# EAGLE board LED-mini20-SHIM-x2 (EAGLE 9.6.2)
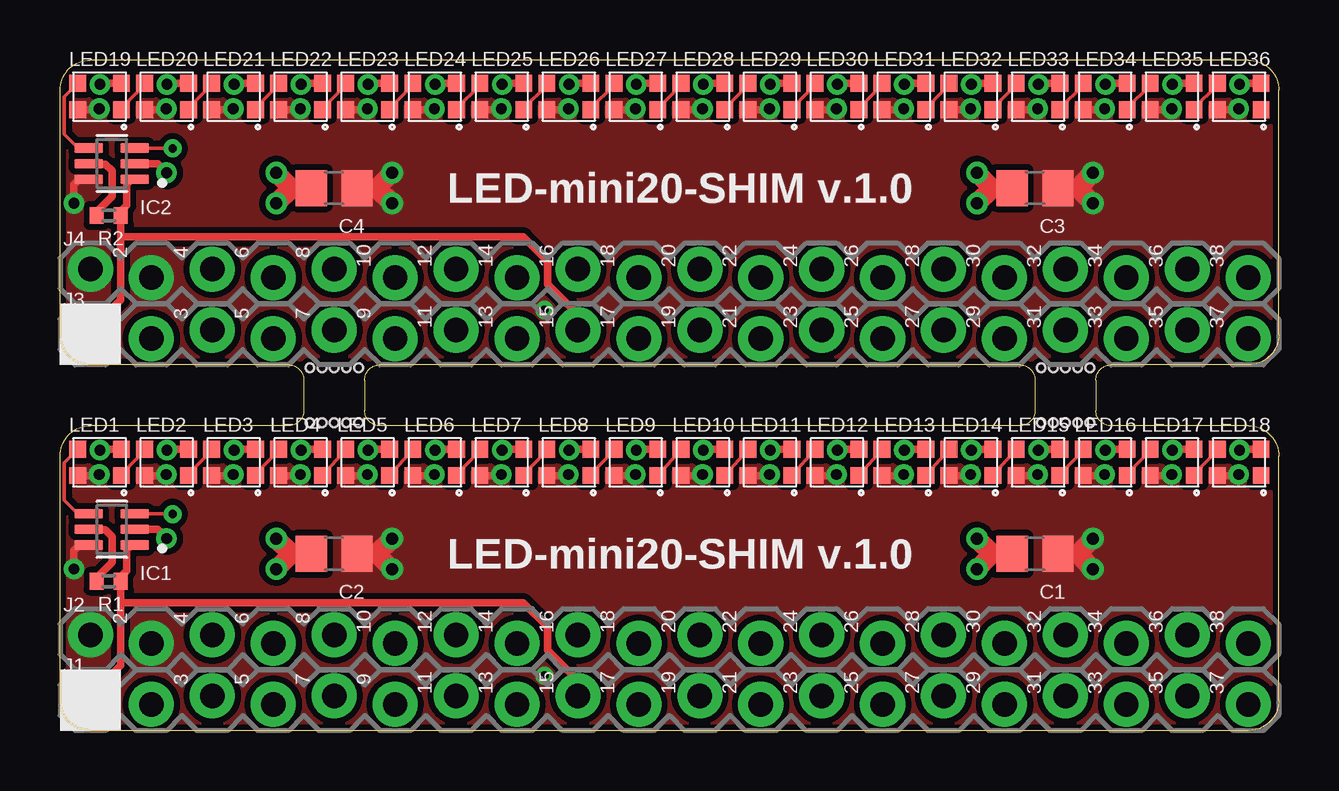
[diagram p0: board, top side]
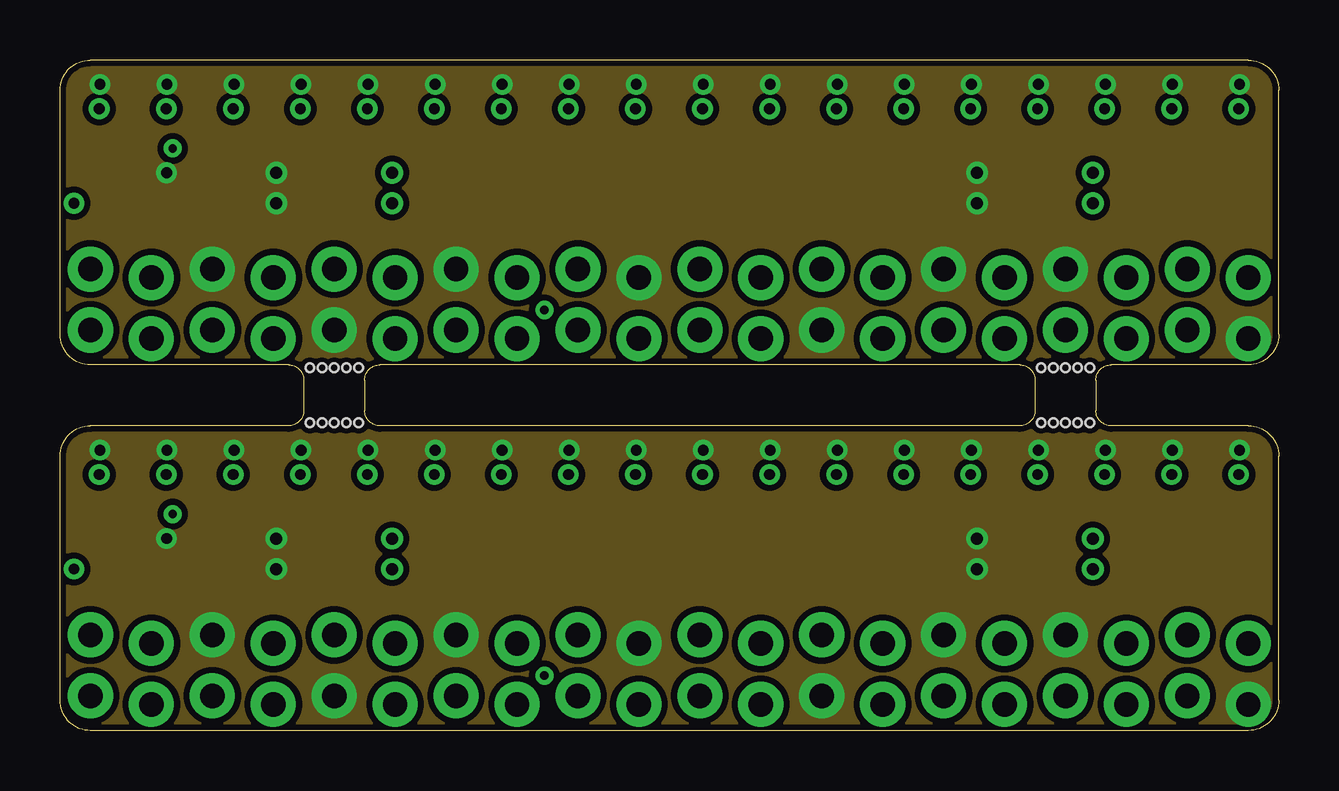
[diagram p1: board, inner layer Route2]
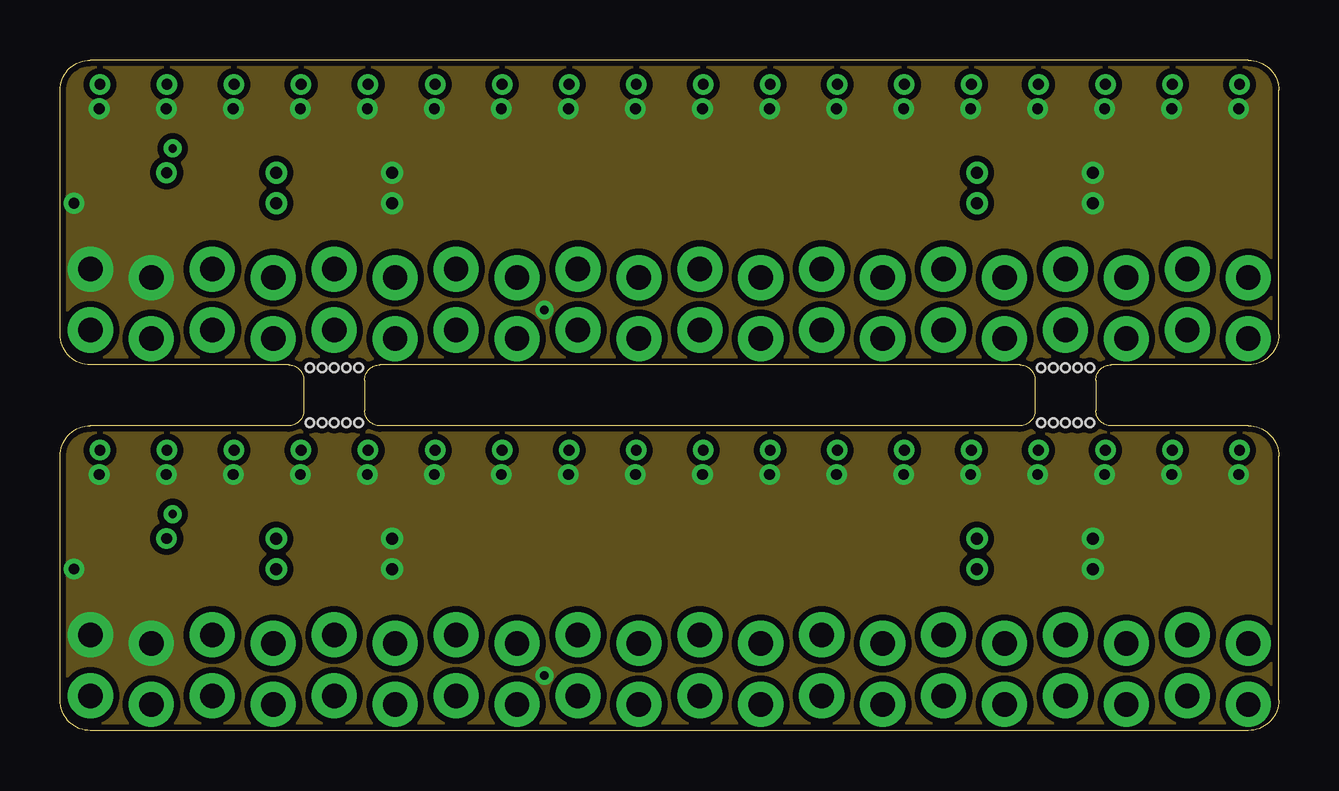
[diagram p2: board, inner layer Route15]
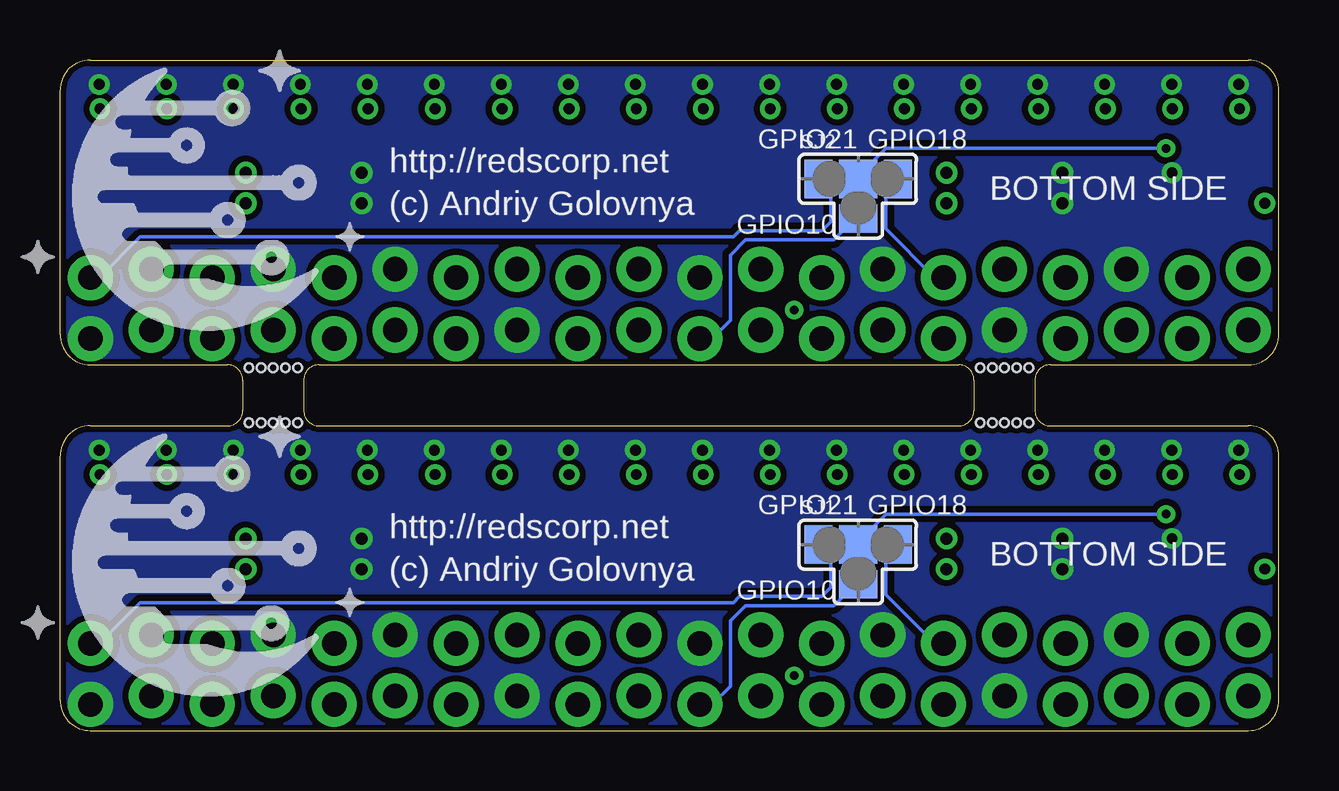
[diagram p3: board, bottom side, seen from below]

Size 50.8 x 27.94 mm. Coordinates in mm from the lower left corner, seen from the top.
Outline: 50.8,16.51 50.8,26.67 arc90 49.53,27.94 1.27,27.94 arc90 0,26.67 0,16.51 arc90 1.27,15.24 9.53,15.24 arc-90 10.16,14.61 10.16,13.34 arc-90 9.53,12.7 1.27,12.7 arc90 0,11.43 0,1.27 arc90 1.27,0 49.53,0 arc90 50.8,1.27 50.8,11.43 arc90 49.53,12.7 43.81,12.7 arc-90 43.18,13.34 43.18,14.61 arc-90 43.81,15.24 49.53,15.24 arc90 50.8,16.51
Outline: 40.01,15.24 13.34,15.24 arc90 12.7,14.61 12.7,13.34 arc90 13.34,12.7 40.01,12.7 arc90 40.64,13.34 40.64,14.61 arc90 40.01,15.24
Copper layers (1+2*15+16): Top 0.035mm / dielectric 0.2mm / Route2 0.035mm / dielectric 1.5mm / Route15 0.035mm / dielectric 0.2mm / Bottom 0.035mm
Design rules "default *": minimum track width 6mil, minimum drill 0.35mm, track to track 6mil, track to pad 6mil, pad to pad 6mil, via to via 6mil, smd to smd 6mil, copper to edge 6mil, drill to drill 6mil, minimum pad ring 10mil, minimum via ring 8mil, stop-mask expansion 4mil, vias tented up to drill 20mil, thermal gap 10mil
Holes 0.35 mm at 41.91,15.11 42.42,15.11 42.93,15.11 41.4,15.11 40.89,15.11 41.91,12.83 42.42,12.83 42.93,12.83 41.4,12.83 40.89,12.83 11.43,15.11 11.94,15.11 12.45,15.11 10.92,15.11 10.41,15.11 11.43,12.83 11.94,12.83 12.45,12.83 10.92,12.83 10.41,12.83

## Footprints (pad centres in the part's own frame; a part is rotated, then mirrored left to right if it is on the bottom)
C0805 = smd 1.3 x 1.5: 1 -0.95,0; 2 0.95,0
SOT65P210X110-6N = smd 1.19 x 0.4: 1 -0.96,0.65; 2 -0.96,0; 3 -0.96,-0.65; 4 0.96,-0.65; 5 0.96,0; 6 0.96,0.65
1X20_LOCK = drill 1.016 pad 1.88: 1 0,0.178; 2 2.54,-0.178; 3 5.08,0.178; 4 7.62,-0.178; 5 10.16,0.178; 6 12.7,-0.178; 7 15.24,0.178; 8 17.78,-0.178; 9 20.32,0.178; 10 22.86,-0.178; 11 25.4,0.178; 12 27.94,-0.178; 13 30.48,0.178; 14 33.02,-0.178; 15 35.56,0.178; 16 38.1,-0.178; 17 40.64,0.178; 18 43.18,-0.178; 19 45.72,0.178; 20 48.26,-0.178
WS2812X-2020 = smd 0.7 x 0.7: DI -0.915,0.55; DO 0.915,-0.55; GND 0.915,0.55; VDD -0.915,-0.55
R0402 = smd 0.6 x 0.7: 1 -0.5,0; 2 0.5,0
SJ_3 = smd 1.168 x 1.6: 1 -1.651,0; 3 1.651,0 | smd 1.6 x 1.6: 2 0,0 | smd 1.6 x 1.168: 4 0,-1.651

## Placement (x,y rotation side)
C1  10uF  [C0805]  40.64,7.37 180 top
C2  10uF  [C0805]  11.43,7.37 180 top
C3  10uF  [C0805]  40.64,22.61 180 top
C4  10uF  [C0805]  11.43,22.61 180 top
IC1  TXB0101DCKR  [SOT65P210X110-6N]  2.16,8.38 180 top
IC2  TXB0101DCKR  [SOT65P210X110-6N]  2.16,23.62 180 top
J1  [1X20_LOCK]  1.27,1.27 0 top
J2  [1X20_LOCK]  1.27,3.81 0 top
J3  [1X20_LOCK]  1.27,16.51 0 top
J4  [1X20_LOCK]  1.27,19.05 0 top
LED1  WS2812C-2020  [WS2812X-2020]  1.65,11.18 0 top
LED2  WS2812C-2020  [WS2812X-2020]  4.45,11.18 0 top
LED3  WS2812C-2020  [WS2812X-2020]  7.24,11.18 0 top
LED4  WS2812C-2020  [WS2812X-2020]  10.03,11.18 0 top
LED5  WS2812C-2020  [WS2812X-2020]  12.83,11.18 0 top
LED6  WS2812C-2020  [WS2812X-2020]  15.62,11.18 0 top
LED7  WS2812C-2020  [WS2812X-2020]  18.41,11.18 0 top
LED8  WS2812C-2020  [WS2812X-2020]  21.21,11.18 0 top
LED9  WS2812C-2020  [WS2812X-2020]  24,11.18 0 top
LED10  WS2812C-2020  [WS2812X-2020]  26.8,11.18 0 top
LED11  WS2812C-2020  [WS2812X-2020]  29.59,11.18 0 top
LED12  WS2812C-2020  [WS2812X-2020]  32.38,11.18 0 top
LED13  WS2812C-2020  [WS2812X-2020]  35.18,11.18 0 top
LED14  WS2812C-2020  [WS2812X-2020]  37.97,11.18 0 top
LED15  WS2812C-2020  [WS2812X-2020]  40.77,11.18 0 top
LED16  WS2812C-2020  [WS2812X-2020]  43.56,11.18 0 top
LED17  WS2812C-2020  [WS2812X-2020]  46.35,11.18 0 top
LED18  WS2812C-2020  [WS2812X-2020]  49.15,11.18 0 top
LED19  WS2812C-2020  [WS2812X-2020]  1.65,26.42 0 top
LED20  WS2812C-2020  [WS2812X-2020]  4.45,26.42 0 top
LED21  WS2812C-2020  [WS2812X-2020]  7.24,26.42 0 top
LED22  WS2812C-2020  [WS2812X-2020]  10.03,26.42 0 top
LED23  WS2812C-2020  [WS2812X-2020]  12.83,26.42 0 top
LED24  WS2812C-2020  [WS2812X-2020]  15.62,26.42 0 top
LED25  WS2812C-2020  [WS2812X-2020]  18.41,26.42 0 top
LED26  WS2812C-2020  [WS2812X-2020]  21.21,26.42 0 top
LED27  WS2812C-2020  [WS2812X-2020]  24,26.42 0 top
LED28  WS2812C-2020  [WS2812X-2020]  26.8,26.42 0 top
LED29  WS2812C-2020  [WS2812X-2020]  29.59,26.42 0 top
LED30  WS2812C-2020  [WS2812X-2020]  32.38,26.42 0 top
LED31  WS2812C-2020  [WS2812X-2020]  35.18,26.42 0 top
LED32  WS2812C-2020  [WS2812X-2020]  37.97,26.42 0 top
LED33  WS2812C-2020  [WS2812X-2020]  40.77,26.42 0 top
LED34  WS2812C-2020  [WS2812X-2020]  43.56,26.42 0 top
LED35  WS2812C-2020  [WS2812X-2020]  46.35,26.42 0 top
LED36  WS2812C-2020  [WS2812X-2020]  49.15,26.42 0 top
LOGO1  MFDECLOGO_L_10MM  [MFDEC_L_10MM]  53.21,0.51 0 bottom
LOGO2  MFDECLOGO_L_10MM  [MFDEC_L_10MM]  53.21,15.75 0 bottom
R1  10K  [R0402]  2.03,6.22 180 top
R2  10K  [R0402]  2.03,21.46 180 top
SJ1  [SJ_3]  17.53,7.75 0 bottom
SJ2  [SJ_3]  17.53,22.99 0 bottom

## Library data of the parts
C1-C4 = rcl; SPICEPREFIX: C
IC1 IC2 = TXB0101DCKR
J1-J4 = _my_locked_connectors
LED1-LED36 = WS281X
LOGO1 LOGO2 = _my_logos
R1 R2 = rcl; SPICEPREFIX: R
SJ1 SJ2 = _my_jumpers

## Nets
3.3V: IC1.1 J1.1 J1.9 R1.1
3.3V1: IC2.1 J3.1 J3.9 R2.1
5V: C1.1 C2.1 IC1.6 J2.1 J2.2 LED1.VDD LED2.VDD LED3.VDD LED4.VDD LED5.VDD LED6.VDD LED7.VDD LED8.VDD LED9.VDD LED10.VDD LED11.VDD LED12.VDD LED13.VDD LED14.VDD LED15.VDD LED16.VDD LED17.VDD LED18.VDD
5V1: C3.1 C4.1 IC2.6 J4.1 J4.2 LED19.VDD LED20.VDD LED21.VDD LED22.VDD LED23.VDD LED24.VDD LED25.VDD LED26.VDD LED27.VDD LED28.VDD LED29.VDD LED30.VDD LED31.VDD LED32.VDD LED33.VDD LED34.VDD LED35.VDD LED36.VDD
DATA: IC1.3 SJ1.2
DATA1: IC2.3 SJ2.2
DI_FIRST: IC1.4 LED1.DI
DI_FIRST1: IC2.4 LED19.DI
DO_LAST: LED18.DO
DO_LAST1: LED36.DO
GND: C1.2 C2.2 IC1.2 J1.5 J1.13 J1.20 J2.3 J2.7 J2.10 J2.15 J2.17 LED1.GND LED2.GND LED3.GND LED4.GND LED5.GND LED6.GND LED7.GND LED8.GND LED9.GND LED10.GND LED11.GND LED12.GND LED13.GND LED14.GND LED15.GND LED16.GND LED17.GND LED18.GND
GND1: C3.2 C4.2 IC2.2 J3.5 J3.13 J3.20 J4.3 J4.7 J4.10 J4.15 J4.17 LED19.GND LED20.GND LED21.GND LED22.GND LED23.GND LED24.GND LED25.GND LED26.GND LED27.GND LED28.GND LED29.GND LED30.GND LED31.GND LED32.GND LED33.GND LED34.GND LED35.GND LED36.GND
GPIO0: J1.14
GPIO1: J2.14
GPIO2: J1.2
GPIO3: J1.3
GPIO4: J1.4
GPIO5: J1.15
GPIO6: J1.16
GPIO7: J2.13
GPIO8: J2.12
GPIO9: J1.11
GPIO10: J1.10 SJ1.4
GPIO11: J1.12
GPIO12: J2.16
GPIO13: J1.17
GPIO14: J2.4
GPIO15: J2.5
GPIO16: J2.18
GPIO17: J1.6
GPIO18: J2.6 SJ1.3
GPIO19: J1.18
GPIO20: J2.19
GPIO21: J2.20 SJ1.1
GPIO22: J1.8
GPIO23: J2.8
GPIO24: J2.9
GPIO25: J2.11
GPIO26: J1.19
GPIO27: J1.7
GPIO28: J3.2
GPIO29: J3.3
GPIO30: J3.4
GPIO31: J3.6
GPIO32: J3.7
GPIO33: J3.8
GPIO34: J3.10 SJ2.4
GPIO35: J3.11
GPIO36: J3.12
GPIO37: J3.14
GPIO38: J3.15
GPIO39: J3.16
GPIO40: J3.17
GPIO41: J3.18
GPIO42: J3.19
GPIO43: J4.4
GPIO44: J4.5
GPIO45: J4.6 SJ2.3
GPIO46: J4.8
GPIO47: J4.9
GPIO48: J4.11
GPIO49: J4.12
GPIO50: J4.13
GPIO51: J4.14
GPIO52: J4.16
GPIO53: J4.18
GPIO54: J4.19
GPIO55: J4.20 SJ2.1
N$1: LED1.DO LED2.DI
N$2: LED2.DO LED3.DI
N$3: LED3.DO LED4.DI
N$4: LED4.DO LED5.DI
N$5: LED5.DO LED6.DI
N$6: LED6.DO LED7.DI
N$7: LED7.DO LED8.DI
N$8: LED8.DO LED9.DI
N$9: LED9.DO LED10.DI
N$10: LED10.DO LED11.DI
N$11: LED11.DO LED12.DI
N$12: LED12.DO LED13.DI
N$13: LED13.DO LED14.DI
N$14: LED14.DO LED15.DI
N$15: LED15.DO LED16.DI
N$16: LED16.DO LED17.DI
N$17: LED17.DO LED18.DI
N$18: LED19.DO LED20.DI
N$19: LED20.DO LED21.DI
N$20: LED21.DO LED22.DI
N$21: LED22.DO LED23.DI
N$22: LED23.DO LED24.DI
N$23: LED24.DO LED25.DI
N$24: LED25.DO LED26.DI
N$25: LED26.DO LED27.DI
N$26: LED27.DO LED28.DI
N$27: LED28.DO LED29.DI
N$28: LED29.DO LED30.DI
N$29: LED30.DO LED31.DI
N$30: LED31.DO LED32.DI
N$31: LED32.DO LED33.DI
N$32: LED33.DO LED34.DI
N$33: LED34.DO LED35.DI
N$34: LED35.DO LED36.DI
N$35: IC2.5 R2.2
N$143: IC1.5 R1.2

## Tracks (layer width: path | path; a pad name or v marks a point on that pad's centre or on a via)
3.3V
  Top 0.305: J1.1 2.54,2.72 2.54,5.33 | 2.54,5.33 R1.1 2.53,6.4 2.79,6.66 2.79,7.53 2.99,7.73 IC1.1 | J1.9 21.59,2.08 20.32,3.35 20.32,4.32 19.3,5.33 2.54,5.33
3.3V1
  Top 0.305: J3.1 2.54,17.96 2.54,20.57 | 2.54,20.57 R2.1 2.53,21.64 2.79,21.89 2.79,22.77 2.99,22.97 IC2.1 | J3.9 21.59,17.32 20.32,18.59 20.32,19.56 19.3,20.57 2.54,20.57
5V  (via drill 0.35, 0.45, 0.5)
  Top 0.305: LED1.VDD 1.59,10.63 v1.64,10.67 | LED2.VDD 4.39,10.63 v4.43,10.67 | LED3.VDD 7.18,10.63 v7.22,10.67 | LED4.VDD 9.97,10.63 v10.02,10.67 | LED5.VDD 12.77,10.63 v12.81,10.67 | LED6.VDD 15.56,10.63 v15.61,10.67 | LED7.VDD 18.36,10.63 v18.4,10.67 | LED8.VDD 21.15,10.63 v21.19,10.67 | LED9.VDD 23.95,10.63 v23.99,10.67 | LED10.VDD 26.74,10.63 v26.78,10.67 | LED11.VDD 29.53,10.63 v29.57,10.67 | LED12.VDD 32.33,10.63 v32.37,10.67 | LED13.VDD 35.12,10.63 v35.16,10.67 | LED14.VDD 37.91,10.63 v37.96,10.67 | LED15.VDD 40.71,10.63 v40.75,10.67 | LED16.VDD 43.5,10.63 v43.55,10.67 | LED17.VDD 46.3,10.63 v46.34,10.67 | LED18.VDD 49.09,10.63 v49.13,10.67 | v0.58,6.73 0.58,7.49 0.82,7.73 IC1.6
  Top 0.813: 13.21,7.37 v13.84,6.73 | C2.1 13.21,7.37 | 13.21,7.37 v13.84,8 | 42.42,7.37 v43.05,6.73 | C1.1 42.42,7.37 | 42.42,7.37 v43.05,8
  other vias: 20.19,2.29
  pour Top (isolate 0.254, no thermals): -3.81,0 -3.81,12.7 50.8,12.7 50.8,0
  pour Route15 (isolate 0.254, no thermals): 0,-3.81 0,12.7 50.8,12.7 50.8,-3.81
5V1  (via drill 0.35, 0.45, 0.5)
  Top 0.305: LED19.VDD 1.59,25.87 v1.64,25.91 | LED20.VDD 4.39,25.87 v4.43,25.91 | LED21.VDD 7.18,25.87 v7.22,25.91 | LED22.VDD 9.97,25.87 v10.02,25.91 | LED23.VDD 12.77,25.87 v12.81,25.91 | LED24.VDD 15.56,25.87 v15.61,25.91 | LED25.VDD 18.36,25.87 v18.4,25.91 | LED26.VDD 21.15,25.87 v21.19,25.91 | LED27.VDD 23.95,25.87 v23.99,25.91 | LED28.VDD 26.74,25.87 v26.78,25.91 | LED29.VDD 29.53,25.87 v29.57,25.91 | LED30.VDD 32.33,25.87 v32.37,25.91 | LED31.VDD 35.12,25.87 v35.16,25.91 | LED32.VDD 37.91,25.87 v37.96,25.91 | LED33.VDD 40.71,25.87 v40.75,25.91 | LED34.VDD 43.5,25.87 v43.55,25.91 | LED35.VDD 46.3,25.87 v46.34,25.91 | LED36.VDD 49.09,25.87 v49.13,25.91 | v0.58,21.97 0.58,22.73 0.82,22.97 IC2.6
  Top 0.813: 13.21,22.61 v13.84,21.97 | C4.1 13.21,22.61 | 13.21,22.61 v13.84,23.24 | 42.42,22.61 v43.05,21.97 | C3.1 42.42,22.61 | 42.42,22.61 v43.05,23.24
  other vias: 20.19,17.53
  pour Top (isolate 0.254, no thermals): -3.81,15.24 -3.81,27.94 50.8,27.94 50.8,15.24
  pour Route15 (isolate 0.254, no thermals): 0,15.24 0,27.94 50.8,27.94 50.8,15.24
DATA  (via drill 0.35)
  Top 0.152: IC1.3 4.68,9.03 v4.7,9.02
  Bottom 0.152: v4.7,9.02 16.38,9.02 17.53,7.87 SJ1.2
DATA1  (via drill 0.35)
  Top 0.152: IC2.3 4.68,24.27 v4.7,24.26
  Bottom 0.152: v4.7,24.26 16.38,24.26 17.53,23.11 SJ2.2
DI_FIRST
  Top 0.152: LED1.DI 0.18,11.17 0.18,9.6 0.76,9.02 1.18,9.02 IC1.4
DI_FIRST1
  Top 0.152: LED19.DI 0.18,26.41 0.18,24.84 0.76,24.26 1.18,24.26 IC2.4
GND  (via drill 0.45, 0.5)
  Top 0.305: LED1.GND 1.71,11.73 v1.67,11.68 | LED2.GND 4.5,11.73 v4.46,11.68 | LED3.GND 7.3,11.73 v7.25,11.68 | LED4.GND 10.09,11.73 v10.05,11.68 | LED5.GND 12.88,11.73 v12.84,11.68 | LED6.GND 15.68,11.73 v15.64,11.68 | LED7.GND 18.47,11.73 v18.43,11.68 | LED8.GND 21.27,11.73 v21.23,11.68 | LED9.GND 24.06,11.73 v24.02,11.68 | LED10.GND 26.86,11.73 v26.81,11.68 | LED11.GND 29.65,11.73 v29.61,11.68 | LED12.GND 32.44,11.73 v32.4,11.68 | LED13.GND 35.24,11.73 v35.2,11.68 | LED14.GND 38.03,11.73 v37.99,11.68 | LED15.GND 40.83,11.73 v40.78,11.68 | LED16.GND 43.62,11.73 v43.58,11.68 | LED17.GND 46.41,11.73 v46.37,11.68 | LED18.GND 49.21,11.73 v49.16,11.68 | v4.45,8 4.06,8.38 IC1.2
  Top 0.813: 9.65,7.37 v9.02,8 | C2.2 9.65,7.37 | 9.65,7.37 v9.02,6.73 | 38.86,7.37 v38.23,8 | C1.2 38.86,7.37 | 38.86,7.37 v38.23,6.73
  pour Bottom (isolate 0.254, no thermals): 0,0 0,12.7 54.61,12.7 54.61,0
  pour Route2 (isolate 0.254, no thermals): 0,0 0,12.7 50.67,12.7 50.67,0
GND1  (via drill 0.45, 0.5)
  Top 0.305: LED19.GND 1.71,26.97 v1.67,26.92 | LED20.GND 4.5,26.97 v4.46,26.92 | LED21.GND 7.3,26.97 v7.25,26.92 | LED22.GND 10.09,26.97 v10.05,26.92 | LED23.GND 12.88,26.97 v12.84,26.92 | LED24.GND 15.68,26.97 v15.64,26.92 | LED25.GND 18.47,26.97 v18.43,26.92 | LED26.GND 21.27,26.97 v21.23,26.92 | LED27.GND 24.06,26.97 v24.02,26.92 | LED28.GND 26.86,26.97 v26.81,26.92 | LED29.GND 29.65,26.97 v29.61,26.92 | LED30.GND 32.44,26.97 v32.4,26.92 | LED31.GND 35.24,26.97 v35.2,26.92 | LED32.GND 38.03,26.97 v37.99,26.92 | LED33.GND 40.83,26.97 v40.78,26.92 | LED34.GND 43.62,26.97 v43.58,26.92 | LED35.GND 46.41,26.97 v46.37,26.92 | LED36.GND 49.21,26.97 v49.16,26.92 | v4.45,23.24 4.06,23.62 IC2.2
  Top 0.813: 9.65,22.61 v9.02,23.24 | C4.2 9.65,22.61 | 9.65,22.61 v9.02,21.97 | 38.86,22.61 v38.23,23.24 | C3.2 38.86,22.61 | 38.86,22.61 v38.23,21.97
  pour Bottom (isolate 0.254, no thermals): 0,15.24 0,27.94 54.61,27.94 54.61,15.24
  pour Route2 (isolate 0.254, no thermals): 0,15.24 0,31.75 50.8,31.75 50.8,15.24
GPIO10
  Bottom 0.152: J1.10 23.62,1.09 22.86,1.85 22.86,4.57 22.23,5.21 18.54,5.21 17.65,6.1 SJ1.4
GPIO18
  Bottom 0.152: J2.6 14.35,3.63 16.38,5.66 16.38,7.24 SJ1.3 17.13,7.75
GPIO21
  Bottom 0.152: SJ1.1 19.18,7.62 18.67,7.11 18.67,5.97 19.05,5.59 22.48,5.59 22.73,5.33 47.45,5.33 49.15,3.63 J2.20
GPIO34
  Bottom 0.152: J3.10 23.62,16.33 22.86,17.09 22.86,19.81 22.23,20.45 18.54,20.45 17.65,21.34 SJ2.4
GPIO45
  Bottom 0.152: J4.6 14.35,18.87 16.38,20.9 16.38,22.48 SJ2.3 17.13,22.99
GPIO55
  Bottom 0.152: SJ2.1 19.18,22.86 18.67,22.35 18.67,21.21 19.05,20.83 22.48,20.83 22.73,20.57 47.45,20.57 49.15,18.87 J4.20
N$1
  Top 0.152: LED2.DI 3.53,11.67 2.57,10.7 LED1.DO
N$2
  Top 0.152: LED3.DI 6.32,11.67 5.36,10.7 LED2.DO
N$3
  Top 0.152: LED4.DI 9.12,11.67 8.15,10.7 LED3.DO
N$4
  Top 0.152: LED4.DO 10.95,10.69 11.91,11.65 LED5.DI
N$5
  Top 0.152: LED5.DO 13.74,10.69 14.71,11.65 LED6.DI
N$6
  Top 0.152: LED6.DO 16.54,10.69 17.5,11.65 LED7.DI
N$7
  Top 0.152: LED7.DO 19.33,10.69 20.29,11.65 LED8.DI
N$8
  Top 0.152: LED8.DO 22.12,10.69 23.09,11.65 LED9.DI
N$9
  Top 0.152: LED9.DO 24.92,10.69 25.88,11.65 LED10.DI
N$10
  Top 0.152: LED10.DO 27.71,10.69 28.68,11.65 LED11.DI
N$11
  Top 0.152: LED11.DO 30.51,10.69 31.47,11.65 LED12.DI
N$12
  Top 0.152: LED12.DO 33.3,10.69 34.26,11.65 LED13.DI
N$13
  Top 0.152: LED13.DO 36.09,10.69 37.06,11.65 LED14.DI
N$14
  Top 0.152: LED14.DO 38.89,10.69 39.85,11.65 LED15.DI
N$15
  Top 0.152: LED15.DO 41.68,10.69 42.65,11.65 LED16.DI
N$16
  Top 0.152: LED16.DO 44.48,10.69 45.44,11.65 LED17.DI
N$17
  Top 0.152: LED17.DO 47.27,10.69 48.23,11.65 LED18.DI
N$18
  Top 0.152: LED20.DI 3.53,26.91 2.57,25.94 LED19.DO
N$19
  Top 0.152: LED21.DI 6.32,26.91 5.36,25.94 LED20.DO
N$20
  Top 0.152: LED22.DI 9.12,26.91 8.15,25.94 LED21.DO
N$21
  Top 0.152: LED22.DO 10.95,25.93 11.91,26.89 LED23.DI
N$22
  Top 0.152: LED23.DO 13.74,25.93 14.71,26.89 LED24.DI
N$23
  Top 0.152: LED24.DO 16.54,25.93 17.5,26.89 LED25.DI
N$24
  Top 0.152: LED25.DO 19.33,25.93 20.29,26.89 LED26.DI
N$25
  Top 0.152: LED26.DO 22.12,25.93 23.09,26.89 LED27.DI
N$26
  Top 0.152: LED27.DO 24.92,25.93 25.88,26.89 LED28.DI
N$27
  Top 0.152: LED28.DO 27.71,25.93 28.68,26.89 LED29.DI
N$28
  Top 0.152: LED29.DO 30.51,25.93 31.47,26.89 LED30.DI
N$29
  Top 0.152: LED30.DO 33.3,25.93 34.26,26.89 LED31.DI
N$30
  Top 0.152: LED31.DO 36.09,25.93 37.06,26.89 LED32.DI
N$31
  Top 0.152: LED32.DO 38.89,25.93 39.85,26.89 LED33.DI
N$32
  Top 0.152: LED33.DO 41.68,25.93 42.65,26.89 LED34.DI
N$33
  Top 0.152: LED34.DO 44.48,25.93 45.44,26.89 LED35.DI
N$34
  Top 0.152: LED35.DO 47.27,25.93 48.23,26.89 LED36.DI
N$35
  Top 0.305: IC2.5 1.22,23.6 1.89,23.6 2.17,23.32 2.17,22.26 1.53,21.61 R2.2
N$143
  Top 0.305: IC1.5 1.22,8.36 1.89,8.36 2.17,8.08 2.17,7.02 1.53,6.38 R1.2

## Text on the board
tPlace: LED-mini20-SHIM v.1.0 | 2 | 4 | 6 | 8 | 10 | 12 | 14 | 16 | 18 | 20 | 22 | 24 | 26 | 28 | 30 | 32 | 34 | 36 | 38 | 3 | 5 | 7 | 9 | 11 | 13 | 15 | 17 | 19 | 21 | 23 | 25 | 27 | 29 | 31 | 33 | 35 | 37 | LED-mini20-SHIM v.1.0 | 2 | 4 | 6 | 8 | 10 | 12 | 14 | 16 | 18 | 20 | 22 | 24 | 26 | 28 | 30 | 32 | 34 | 36 | 38 | 3 | 5 | 7 | 9 | 11 | 13 | 15 | 17 | 19 | 21 | 23 | 25 | 27 | 29 | 31 | 33 | 35 | 37
bPlace: GPIO18 | GPIO21 | http://redscorp.net | BOTTOM SIDE | GPIO10 | (c) Andriy Golovnya | GPIO18 | GPIO21 | http://redscorp.net | BOTTOM SIDE | (c) Andriy Golovnya | GPIO10